# EAGLE board tinyI2C_P (EAGLE 6.5.0), part 1 of 2
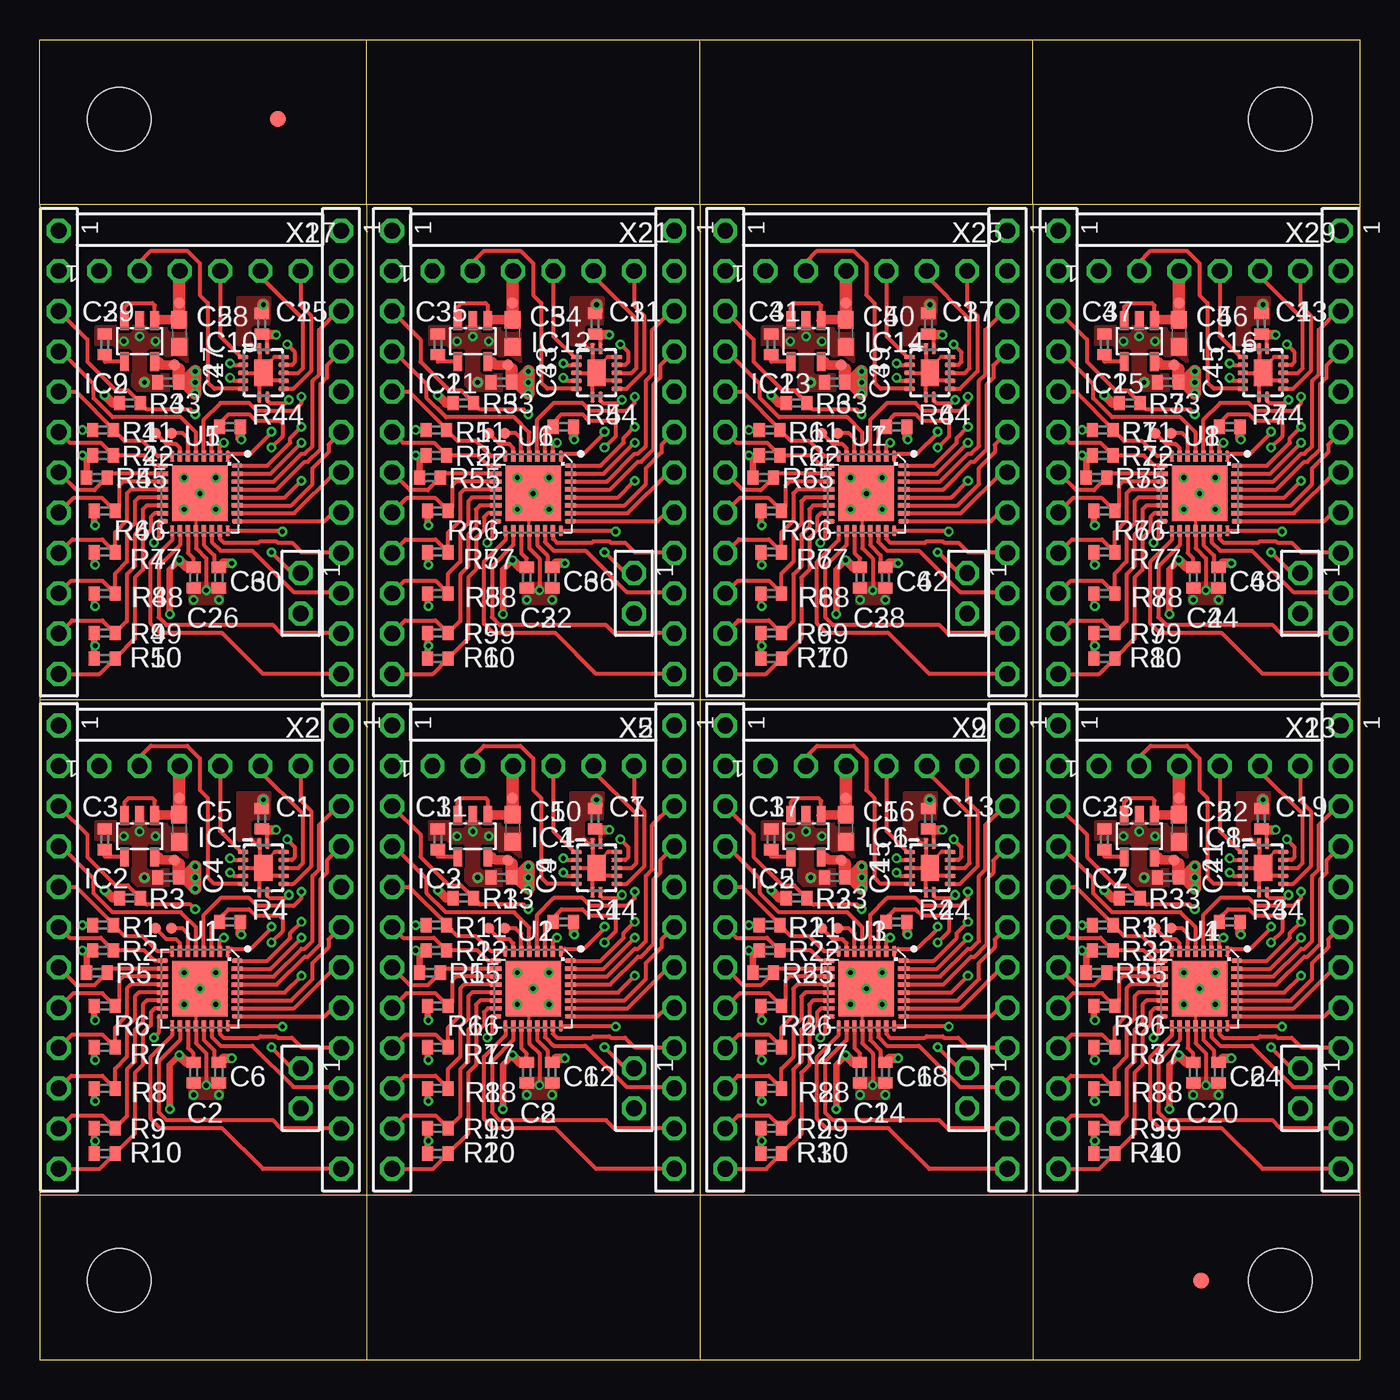
[diagram p0: board, top side]
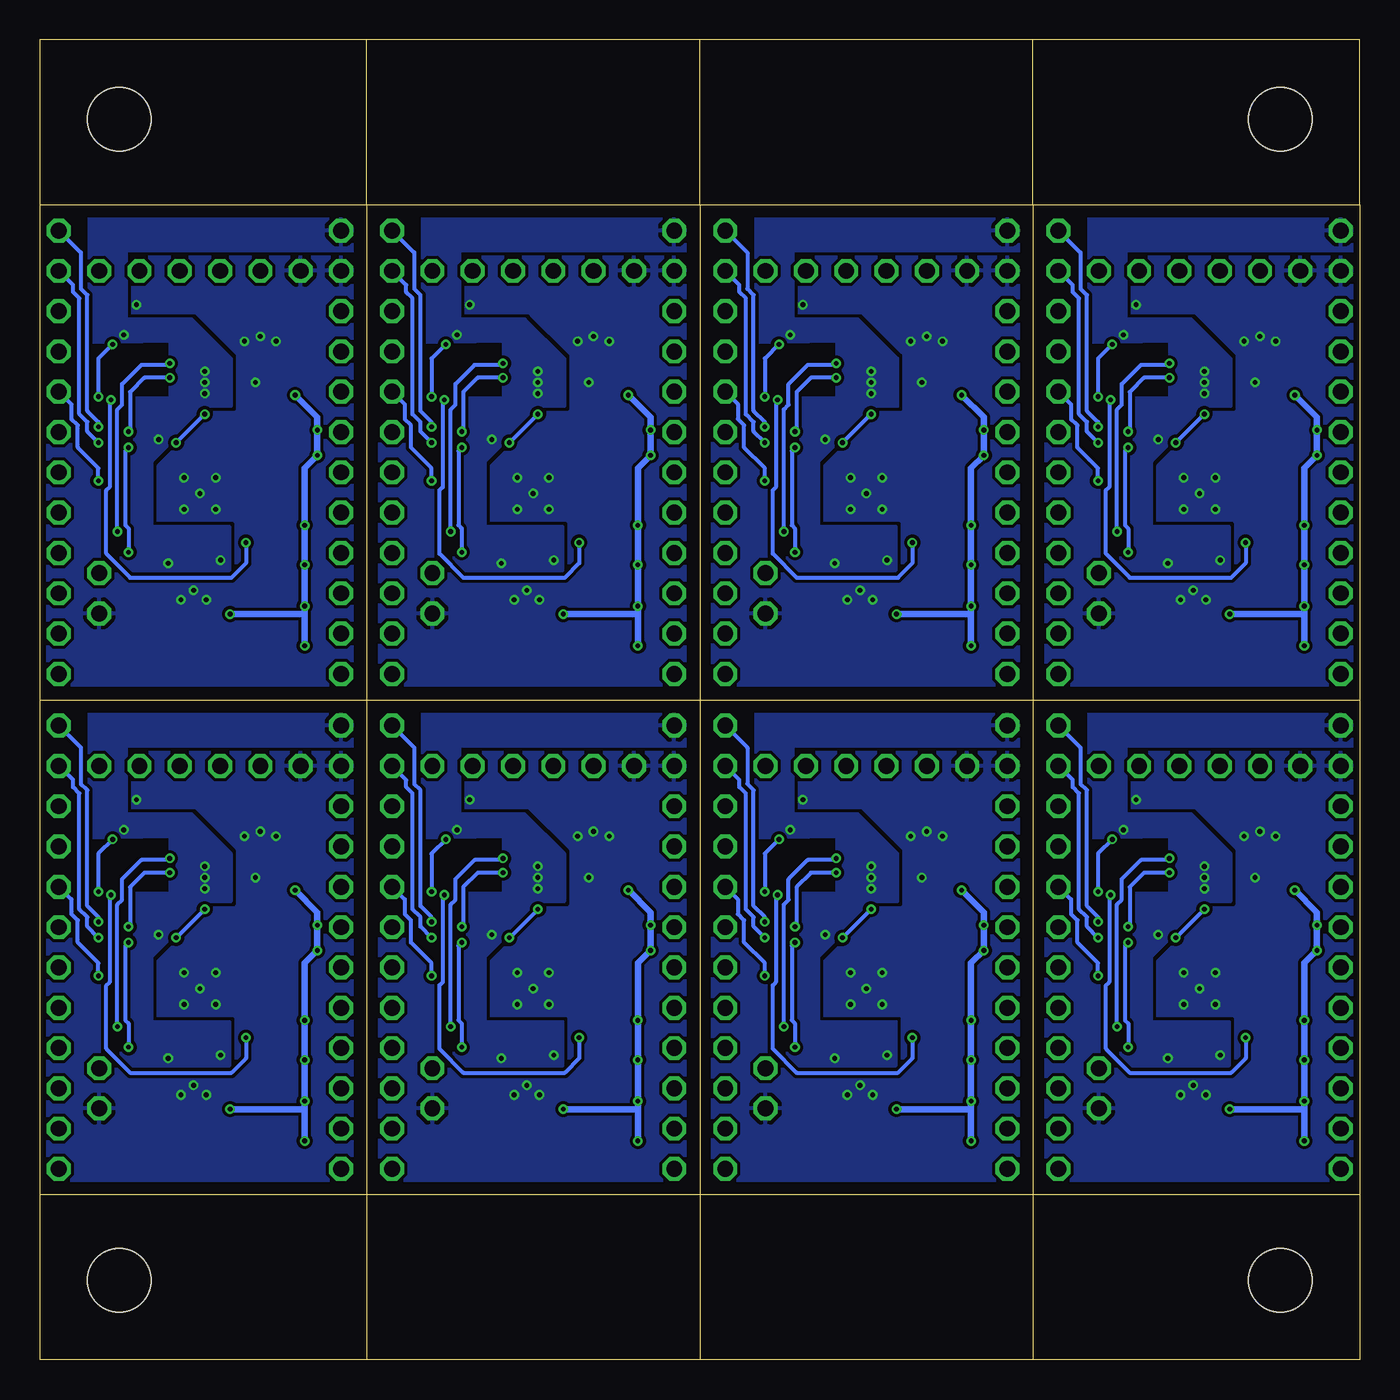
[diagram p1: board, bottom side, seen from below]

Size 83.2 x 83.2 mm. Coordinates in mm from the lower left corner, seen from the top.
Outline: 0,10.4 20.6,10.4
Outline: 20.6,10.4 41.6,10.4
Outline: 41.6,10.4 62.6,10.4
Outline: 62.6,10.4 83.2,10.4
Outline: 83.2,72.8 62.6,72.8
Outline: 62.6,72.8 41.6,72.8
Outline: 41.6,72.8 20.6,72.8
Outline: 20.6,72.8 0,72.8
Outline: 0,72.8 0,41.6
Outline: 0,41.6 0,10.4
Outline: 83.2,72.8 83.2,41.6
Outline: 83.2,41.6 83.2,10.4
Outline: 20.6,72.8 20.6,41.6
Outline: 20.6,41.6 20.6,10.4
Outline: 20.6,41.6 0,41.6
Outline: 41.6,72.8 41.6,41.6
Outline: 41.6,41.6 20.6,41.6
Outline: 41.6,41.6 41.6,10.4
Outline: 62.6,41.6 41.6,41.6
Outline: 62.6,72.8 62.6,41.6
Outline: 83.2,41.6 62.6,41.6
Outline: 62.6,41.6 62.6,10.4
Outline: 0,72.8 0,83.2 20.6,83.2
Outline: 20.6,83.2 41.6,83.2
Outline: 41.6,83.2 62.6,83.2
Outline: 62.6,83.2 83.2,83.2 83.2,72.8
Outline: 83.2,10.4 83.2,0 62.6,0
Outline: 20.6,0 0,0 0,10.4
Outline: 20.6,0 41.6,0
Outline: 41.6,0 62.6,0
Outline: 20.6,72.8 20.6,83.2
Outline: 41.6,72.8 41.6,83.2
Outline: 62.6,72.8 62.6,83.2
Outline: 62.6,10.4 62.6,0
Outline: 41.6,10.4 41.6,0
Outline: 20.6,10.4 20.6,0
Copper layers (1*16): Top 0.035mm / dielectric 1.5mm / Bottom 0.035mm
Design rules "default *": minimum track width 0.15mm, minimum drill 0.3mm, track to track 0.15mm, track to pad 0.15mm, pad to pad 0.15mm, via to via 0.15mm, smd to smd 0mil, copper to edge 0.4mm, drill to drill 8mil, minimum pad ring 0.15mm, minimum via ring 0.15mm, stop-mask expansion 4mil, vias tented up to drill 100mil, thermal gap 10mil
Net classes: 0 default: clearance 0.2 mm; 1 power: clearance 0.2 mm
Holes 4 mm at 5,78.2 78.2,5 78.2,78.2 5,5
bRestrict: 32 lines

## Footprints (pad centres in the part's own frame; a part is rotated, then mirrored left to right if it is on the bottom)
C1005 = smd 0.7 x 0.9: 1 -0.65,0; 2 0.65,0
C1608 = smd 1.1 x 1: 1 -0.85,0; 2 0.85,0
DHVQFN14 = smd 0.7 x 0.28: 1 -1.525,-0.25; 7 1.525,-0.25; 8 1.525,0.25; 14 -1.525,0.25 | smd 0.28 x 0.7: 2 -1,-1.275; 3 -0.5,-1.275; 4 0,-1.275; 5 0.5,-1.275; 6 1,-1.275; 9 1,1.275; 10 0.5,1.275; 11 0,1.275; 12 -0.5,1.275; 13 -1,1.275 | smd 1.65 x 1.15: EXP 0,0
SOT23-DBV = smd 0.55 x 1.2: 1 -0.95,-1.3; 2 0,-1.3; 3 0.95,-1.3; 4 0.95,1.3; 5 -0.95,1.3
R1005 = smd 0.7 x 0.9: 1 -0.65,0; 2 0.65,0
TP07R = smd 0.7 x 0.7: TP 0,0
TP10R = smd 1 x 1: TP 0,0
HVQFN33 = smd 0.7 x 0.28: 1 -2.35,1.75; 2 -2.35,1.25; 3 -2.35,0.75; 4 -2.35,0.25; 5 -2.35,-0.25; 6 -2.35,-0.75; 7 -2.35,-1.25; 8 -2.35,-1.75; 17 2.35,-1.75; 18 2.35,-1.25; 19 2.35,-0.75; 20 2.35,-0.25; 21 2.35,0.25; 22 2.35,0.75; 23 2.35,1.25; 24 2.35,1.75 | smd 0.28 x 0.7: 9 -1.75,-2.35; 10 -1.25,-2.35; 11 -0.75,-2.35; 12 -0.25,-2.35; 13 0.25,-2.35; 14 0.75,-2.35; 15 1.25,-2.35; 16 1.75,-2.35; 25 1.75,2.35; 26 1.25,2.35; 27 0.75,2.35; 28 0.25,2.35; 29 -0.25,2.35; 30 -0.75,2.35; 31 -1.25,2.35; 32 -1.75,2.35 | smd 3.5 x 3.5: EXP 0,0
TSW-112-02-S-S = drill 1 pad 1.5 octagon: 1 13.97,0; 2 11.43,0; 3 8.89,0; 4 6.35,0; 5 3.81,0; 6 1.27,0; 7 -1.27,0; 8 -3.81,0; 9 -6.35,0; 10 -8.89,0; 11 -11.43,0; 12 -13.97,0
TSW-106-02-S-S-RA = drill 1 pad 1.5 octagon: 1 6.35,1.524; 2 3.81,1.524; 3 1.27,1.524; 4 -1.27,1.524; 5 -3.81,1.524; 6 -6.35,1.524
TSW-102-02-S-S = drill 1 pad 1.5 octagon: 1 1.27,0; 2 -1.27,0

## Placement (x,y rotation side)
C1  1005  [C1005]  14,34.1 90 top
C2  1005  [C1005]  9.7,18.1 270 top
C3  1005  [C1005]  4.1,32.8 90 top
C4  1005  [C1005]  8.1,30.4 180 top
C5  1608  [C1608]  8.8,33.5 270 top
C6  1005  [C1005]  11.3,18.1 270 top
C7  1005  [C1005]  35,34.1 90 top
C8  1005  [C1005]  30.7,18.1 270 top
C9  1005  [C1005]  29.1,30.4 180 top
C10  1608  [C1608]  29.8,33.5 270 top
C11  1005  [C1005]  25.1,32.8 90 top
C12  1005  [C1005]  32.3,18.1 270 top
C13  1005  [C1005]  56,34.1 90 top
C14  1005  [C1005]  51.7,18.1 270 top
C15  1005  [C1005]  50.1,30.4 180 top
C16  1608  [C1608]  50.8,33.5 270 top
C17  1005  [C1005]  46.1,32.8 90 top
C18  1005  [C1005]  53.3,18.1 270 top
C19  1005  [C1005]  77,34.1 90 top
C20  1005  [C1005]  72.7,18.1 270 top
C21  1005  [C1005]  71.1,30.4 180 top
C22  1608  [C1608]  71.8,33.5 270 top
C23  1005  [C1005]  67.1,32.8 90 top
C24  1005  [C1005]  74.3,18.1 270 top
C25  1005  [C1005]  14,65.3 90 top
C26  1005  [C1005]  9.7,49.3 270 top
C27  1005  [C1005]  8.1,61.6 180 top
C28  1608  [C1608]  8.8,64.7 270 top
C29  1005  [C1005]  4.1,64 90 top
C30  1005  [C1005]  11.3,49.3 270 top
C31  1005  [C1005]  35,65.3 90 top
C32  1005  [C1005]  30.7,49.3 270 top
C33  1005  [C1005]  29.1,61.6 180 top
C34  1608  [C1608]  29.8,64.7 270 top
C35  1005  [C1005]  25.1,64 90 top
C36  1005  [C1005]  32.3,49.3 270 top
C37  1005  [C1005]  56,65.3 90 top
C38  1005  [C1005]  51.7,49.3 270 top
C39  1005  [C1005]  50.1,61.6 180 top
C40  1608  [C1608]  50.8,64.7 270 top
C41  1005  [C1005]  46.1,64 90 top
C42  1005  [C1005]  53.3,49.3 270 top
C43  1005  [C1005]  77,65.3 90 top
C44  1005  [C1005]  72.7,49.3 270 top
C45  1005  [C1005]  71.1,61.6 180 top
C46  1608  [C1608]  71.8,64.7 270 top
C47  1005  [C1005]  67.1,64 90 top
C48  1005  [C1005]  74.3,49.3 270 top
IC1  74ABT125BQ  [DHVQFN14]  14.1,31 270 top
IC2  TPS76318  [SOT23-DBV]  6.3,33 180 top
IC3  TPS76318  [SOT23-DBV]  27.3,33 180 top
IC4  74ABT125BQ  [DHVQFN14]  35.1,31 270 top
IC5  TPS76318  [SOT23-DBV]  48.3,33 180 top
IC6  74ABT125BQ  [DHVQFN14]  56.1,31 270 top
IC7  TPS76318  [SOT23-DBV]  69.3,33 180 top
IC8  74ABT125BQ  [DHVQFN14]  77.1,31 270 top
IC9  TPS76318  [SOT23-DBV]  6.3,64.2 180 top
IC10  74ABT125BQ  [DHVQFN14]  14.1,62.2 270 top
IC11  TPS76318  [SOT23-DBV]  27.3,64.2 180 top
IC12  74ABT125BQ  [DHVQFN14]  35.1,62.2 270 top
IC13  TPS76318  [SOT23-DBV]  48.3,64.2 180 top
IC14  74ABT125BQ  [DHVQFN14]  56.1,62.2 270 top
IC15  TPS76318  [SOT23-DBV]  69.3,64.2 180 top
IC16  74ABT125BQ  [DHVQFN14]  77.1,62.2 270 top
R1  220/1005  [R1005]  4,27.4 180 top
R2  220/1005  [R1005]  4,25.8 180 top
R3  10k/1005  [R1005]  5.7,29.1 180 top
R4  10k/1005  [R1005]  12,27.6 0 top
R5  10k/1005  [R1005]  3.6,24.4 180 top
R6  10k/1005  [R1005]  4.1,22.3 180 top
R7  10k/1005  [R1005]  4.1,19.7 180 top
R8  10k/1005  [R1005]  4.1,17.1 180 top
R9  10k/1005  [R1005]  4.1,14.6 180 top
R10  10k/1005  [R1005]  4.1,13 180 top
R11  220/1005  [R1005]  25,27.4 180 top
R12  220/1005  [R1005]  25,25.8 180 top
R13  10k/1005  [R1005]  26.7,29.1 180 top
R14  10k/1005  [R1005]  33,27.6 0 top
R15  10k/1005  [R1005]  24.6,24.4 180 top
R16  10k/1005  [R1005]  25.1,22.3 180 top
R17  10k/1005  [R1005]  25.1,19.7 180 top
R18  10k/1005  [R1005]  25.1,17.1 180 top
R19  10k/1005  [R1005]  25.1,14.6 180 top
R20  10k/1005  [R1005]  25.1,13 180 top
R21  220/1005  [R1005]  46,27.4 180 top
R22  220/1005  [R1005]  46,25.8 180 top
R23  10k/1005  [R1005]  47.7,29.1 180 top
R24  10k/1005  [R1005]  54,27.6 0 top
R25  10k/1005  [R1005]  45.6,24.4 180 top
R26  10k/1005  [R1005]  46.1,22.3 180 top
R27  10k/1005  [R1005]  46.1,19.7 180 top
R28  10k/1005  [R1005]  46.1,17.1 180 top
R29  10k/1005  [R1005]  46.1,14.6 180 top
R30  10k/1005  [R1005]  46.1,13 180 top
R31  220/1005  [R1005]  67,27.4 180 top
R32  220/1005  [R1005]  67,25.8 180 top
R33  10k/1005  [R1005]  68.7,29.1 180 top
R34  10k/1005  [R1005]  75,27.6 0 top
R35  10k/1005  [R1005]  66.6,24.4 180 top
R36  10k/1005  [R1005]  67.1,22.3 180 top
R37  10k/1005  [R1005]  67.1,19.7 180 top
R38  10k/1005  [R1005]  67.1,17.1 180 top
R39  10k/1005  [R1005]  67.1,14.6 180 top
R40  10k/1005  [R1005]  67.1,13 180 top
R41  220/1005  [R1005]  4,58.6 180 top
R42  220/1005  [R1005]  4,57 180 top
R43  10k/1005  [R1005]  5.7,60.3 180 top
R44  10k/1005  [R1005]  12,58.8 0 top
R45  10k/1005  [R1005]  3.6,55.6 180 top
R46  10k/1005  [R1005]  4.1,53.5 180 top
R47  10k/1005  [R1005]  4.1,50.9 180 top
R48  10k/1005  [R1005]  4.1,48.3 180 top
R49  10k/1005  [R1005]  4.1,45.8 180 top
R50  10k/1005  [R1005]  4.1,44.2 180 top
R51  220/1005  [R1005]  25,58.6 180 top
R52  220/1005  [R1005]  25,57 180 top
R53  10k/1005  [R1005]  26.7,60.3 180 top
R54  10k/1005  [R1005]  33,58.8 0 top
R55  10k/1005  [R1005]  24.6,55.6 180 top
R56  10k/1005  [R1005]  25.1,53.5 180 top
R57  10k/1005  [R1005]  25.1,50.9 180 top
R58  10k/1005  [R1005]  25.1,48.3 180 top
R59  10k/1005  [R1005]  25.1,45.8 180 top
R60  10k/1005  [R1005]  25.1,44.2 180 top
R61  220/1005  [R1005]  46,58.6 180 top
R62  220/1005  [R1005]  46,57 180 top
R63  10k/1005  [R1005]  47.7,60.3 180 top
R64  10k/1005  [R1005]  54,58.8 0 top
R65  10k/1005  [R1005]  45.6,55.6 180 top
R66  10k/1005  [R1005]  46.1,53.5 180 top
R67  10k/1005  [R1005]  46.1,50.9 180 top
R68  10k/1005  [R1005]  46.1,48.3 180 top
R69  10k/1005  [R1005]  46.1,45.8 180 top
R70  10k/1005  [R1005]  46.1,44.2 180 top
R71  220/1005  [R1005]  67,58.6 180 top
R72  220/1005  [R1005]  67,57 180 top
R73  10k/1005  [R1005]  68.7,60.3 180 top
R74  10k/1005  [R1005]  75,58.8 0 top
R75  10k/1005  [R1005]  66.6,55.6 180 top
R76  10k/1005  [R1005]  67.1,53.5 180 top
R77  10k/1005  [R1005]  67.1,50.9 180 top
R78  10k/1005  [R1005]  67.1,48.3 180 top
R79  10k/1005  [R1005]  67.1,45.8 180 top
R80  10k/1005  [R1005]  67.1,44.2 180 top
TP1  TPTP07R  [TP07R]  8.8,35.4 0 top
TP2  TPTP07R  [TP07R]  8.5,31.5 0 top
TP3  TPTP07R  [TP07R]  6.6,30.4 0 top
TP4  TPTP10R  [TP10R]  15,78.2 0 top
TP5  TPTP10R  [TP10R]  73.2,5 0 top
TP6  TPTP07R  [TP07R]  29.8,35.4 0 top
TP7  TPTP07R  [TP07R]  29.5,31.5 0 top
TP8  TPTP07R  [TP07R]  8.3,27.2 0 top
TP9  TPTP07R  [TP07R]  7.3,27.2 0 top
TP10  TPTP07R  [TP07R]  29.3,27.2 0 top
TP11  TPTP07R  [TP07R]  28.3,27.2 0 top
TP12  TPTP07R  [TP07R]  27.6,30.4 0 top
TP13  TPTP07R  [TP07R]  50.8,35.4 0 top
TP14  TPTP07R  [TP07R]  50.5,31.5 0 top
TP15  TPTP07R  [TP07R]  50.3,27.2 0 top
TP16  TPTP07R  [TP07R]  49.3,27.2 0 top
TP17  TPTP07R  [TP07R]  48.6,30.4 0 top
TP18  TPTP07R  [TP07R]  71.8,35.4 0 top
TP19  TPTP07R  [TP07R]  71.5,31.5 0 top
TP20  TPTP07R  [TP07R]  71.3,27.2 0 top
TP21  TPTP07R  [TP07R]  70.3,27.2 0 top
TP22  TPTP07R  [TP07R]  69.6,30.4 0 top
TP23  TPTP07R  [TP07R]  8.8,66.6 0 top
TP24  TPTP07R  [TP07R]  8.5,62.7 0 top
TP25  TPTP07R  [TP07R]  8.3,58.4 0 top
TP26  TPTP07R  [TP07R]  7.3,58.4 0 top
TP27  TPTP07R  [TP07R]  6.6,61.6 0 top
TP28  TPTP07R  [TP07R]  29.8,66.6 0 top
TP29  TPTP07R  [TP07R]  29.5,62.7 0 top
TP30  TPTP07R  [TP07R]  29.3,58.4 0 top
TP31  TPTP07R  [TP07R]  28.3,58.4 0 top
TP32  TPTP07R  [TP07R]  27.6,61.6 0 top
TP33  TPTP07R  [TP07R]  50.8,66.6 0 top
TP34  TPTP07R  [TP07R]  50.5,62.7 0 top
TP35  TPTP07R  [TP07R]  50.3,58.4 0 top
TP36  TPTP07R  [TP07R]  49.3,58.4 0 top
TP37  TPTP07R  [TP07R]  48.6,61.6 0 top
TP38  TPTP07R  [TP07R]  71.8,66.6 0 top
TP39  TPTP07R  [TP07R]  71.5,62.7 0 top
TP40  TPTP07R  [TP07R]  71.3,58.4 0 top
TP41  TPTP07R  [TP07R]  70.3,58.4 0 top
TP42  TPTP07R  [TP07R]  69.6,61.6 0 top
U1  LPC824M201JHI33  [HVQFN33]  10.1,23.4 270 top
U2  LPC824M201JHI33  [HVQFN33]  31.1,23.4 270 top
U3  LPC824M201JHI33  [HVQFN33]  52.1,23.4 270 top
U4  LPC824M201JHI33  [HVQFN33]  73.1,23.4 270 top
U5  LPC824M201JHI33  [HVQFN33]  10.1,54.6 270 top
U6  LPC824M201JHI33  [HVQFN33]  31.1,54.6 270 top
U7  LPC824M201JHI33  [HVQFN33]  52.1,54.6 270 top
U8  LPC824M201JHI33  [HVQFN33]  73.1,54.6 270 top
X1  TSW-112-02-S-S  [TSW-112-02-S-S]  1.21,26 90 top
X2  TSW-106-02-S-S-RA  [TSW-106-02-S-S-RA]  10.1,38.95 180 top
X3  TSW-112-02-S-S  [TSW-112-02-S-S]  18.99,26 90 top
X4  TSW-102-02-S-S  [TSW-102-02-S-S]  16.45,17.11 90 top
X5  TSW-106-02-S-S-RA  [TSW-106-02-S-S-RA]  31.1,38.95 180 top
X6  TSW-112-02-S-S  [TSW-112-02-S-S]  22.21,26 90 top
X7  TSW-112-02-S-S  [TSW-112-02-S-S]  39.99,26 90 top
X8  TSW-102-02-S-S  [TSW-102-02-S-S]  37.45,17.11 90 top
X9  TSW-106-02-S-S-RA  [TSW-106-02-S-S-RA]  52.1,38.95 180 top
X10  TSW-112-02-S-S  [TSW-112-02-S-S]  43.21,26 90 top
X11  TSW-112-02-S-S  [TSW-112-02-S-S]  60.99,26 90 top
X12  TSW-102-02-S-S  [TSW-102-02-S-S]  58.45,17.11 90 top
X13  TSW-106-02-S-S-RA  [TSW-106-02-S-S-RA]  73.1,38.95 180 top
X14  TSW-112-02-S-S  [TSW-112-02-S-S]  64.21,26 90 top
X15  TSW-112-02-S-S  [TSW-112-02-S-S]  81.99,26 90 top
X16  TSW-102-02-S-S  [TSW-102-02-S-S]  79.45,17.11 90 top
X17  TSW-106-02-S-S-RA  [TSW-106-02-S-S-RA]  10.1,70.15 180 top
X18  TSW-112-02-S-S  [TSW-112-02-S-S]  1.21,57.2 90 top
X19  TSW-112-02-S-S  [TSW-112-02-S-S]  18.99,57.2 90 top
X20  TSW-102-02-S-S  [TSW-102-02-S-S]  16.45,48.31 90 top
X21  TSW-106-02-S-S-RA  [TSW-106-02-S-S-RA]  31.1,70.15 180 top
X22  TSW-112-02-S-S  [TSW-112-02-S-S]  22.21,57.2 90 top
X23  TSW-112-02-S-S  [TSW-112-02-S-S]  39.99,57.2 90 top
X24  TSW-102-02-S-S  [TSW-102-02-S-S]  37.45,48.31 90 top
X25  TSW-106-02-S-S-RA  [TSW-106-02-S-S-RA]  52.1,70.15 180 top
X26  TSW-112-02-S-S  [TSW-112-02-S-S]  43.21,57.2 90 top
X27  TSW-112-02-S-S  [TSW-112-02-S-S]  60.99,57.2 90 top
X28  TSW-102-02-S-S  [TSW-102-02-S-S]  58.45,48.31 90 top
X29  TSW-106-02-S-S-RA  [TSW-106-02-S-S-RA]  73.1,70.15 180 top
X30  TSW-112-02-S-S  [TSW-112-02-S-S]  64.21,57.2 90 top
X31  TSW-112-02-S-S  [TSW-112-02-S-S]  81.99,57.2 90 top
X32  TSW-102-02-S-S  [TSW-102-02-S-S]  79.45,48.31 90 top

## Library data of the parts
C1-C48 R1-R80 = rcl
IC1 IC4 IC6 IC8 IC10 IC12 IC14 IC16 = 74xx-eu_local
IC2 IC3 IC5 IC7 IC9 IC11 IC13 IC15 = texas; MF: TEXAS INSTRUMENT CONNECTORS; MPN: TPS77018DBVR; OC_FARNELL: 1575745; OC_NEWARK: 77C1176
TP1-TP42 = testpad
U1-U8 = mbed-HDK
X1-X32 = con-samtec.local; OC_FARNELL: unknown; OC_NEWARK: unknown

## Nets
1.8V: C1.1 C2.1 C4.1 C6.1 IC1.14 IC2.5 R1.2 R2.2 R3.2 R4.2 R5.2 R6.2 R7.2 R8.2 R9.2 R10.2 TP2.TP U1.19 U1.21 X1.1
1.8V1: C7.1 C8.1 C9.1 C12.1 IC3.5 IC4.14 R11.2 R12.2 R13.2 R14.2 R15.2 R16.2 R17.2 R18.2 R19.2 R20.2 TP7.TP U2.19 U2.21 X6.1
1.8V2: C13.1 C14.1 C15.1 C18.1 IC5.5 IC6.14 R21.2 R22.2 R23.2 R24.2 R25.2 R26.2 R27.2 R28.2 R29.2 R30.2 TP14.TP U3.19 U3.21 X10.1
1.8V3: C19.1 C20.1 C21.1 C24.1 IC7.5 IC8.14 R31.2 R32.2 R33.2 R34.2 R35.2 R36.2 R37.2 R38.2 R39.2 R40.2 TP19.TP U4.19 U4.21 X14.1
1.8V4: C25.1 C26.1 C27.1 C30.1 IC9.5 IC10.14 R41.2 R42.2 R43.2 R44.2 R45.2 R46.2 R47.2 R48.2 R49.2 R50.2 TP24.TP U5.19 U5.21 X18.1
1.8V5: C31.1 C32.1 C33.1 C36.1 IC11.5 IC12.14 R51.2 R52.2 R53.2 R54.2 R55.2 R56.2 R57.2 R58.2 R59.2 R60.2 TP29.TP U6.19 U6.21 X22.1
1.8V6: C37.1 C38.1 C39.1 C42.1 IC13.5 IC14.14 R61.2 R62.2 R63.2 R64.2 R65.2 R66.2 R67.2 R68.2 R69.2 R70.2 TP34.TP U7.19 U7.21 X26.1
1.8V7: C43.1 C44.1 C45.1 C48.1 IC15.5 IC16.14 R71.2 R72.2 R73.2 R74.2 R75.2 R76.2 R77.2 R78.2 R79.2 R80.2 TP39.TP U8.19 U8.21 X30.1
5V: C5.1 IC2.1 IC2.3 TP1.TP X2.3
5V1: C10.1 IC3.1 IC3.3 TP6.TP X5.3
5V2: C16.1 IC5.1 IC5.3 TP13.TP X9.3
5V3: C22.1 IC7.1 IC7.3 TP18.TP X13.3
5V4: C28.1 IC9.1 IC9.3 TP23.TP X17.3
5V5: C34.1 IC11.1 IC11.3 TP28.TP X21.3
5V6: C40.1 IC13.1 IC13.3 TP33.TP X25.3
5V7: C46.1 IC15.1 IC15.3 TP38.TP X29.3
!ISP!: R3.1 U1.2 X1.3
!ISP!1: R13.1 U2.2 X6.3
!ISP!2: R23.1 U3.2 X10.3
!ISP!3: R33.1 U4.2 X14.3
!ISP!4: R43.1 U5.2 X18.3
!ISP!5: R53.1 U6.2 X22.3
!ISP!6: R63.1 U7.2 X26.3
!ISP!7: R73.1 U8.2 X30.3
!RESET!: R4.1 U1.3 X4.1
!RESET!1: R14.1 U2.3 X8.1
!RESET!2: R24.1 U3.3 X12.1
!RESET!3: R34.1 U4.3 X16.1
!RESET!4: R44.1 U5.3 X20.1
!RESET!5: R54.1 U6.3 X24.1
!RESET!6: R64.1 U7.3 X28.1
!RESET!7: R74.1 U8.3 X32.1
CTS<-: IC1.6 X2.2
CTS<-1: IC4.6 X5.2
CTS<-2: IC6.6 X9.2
CTS<-3: IC8.6 X13.2
CTS<-4: IC10.6 X17.2
CTS<-5: IC12.6 X21.2
CTS<-6: IC14.6 X25.2
CTS<-7: IC16.6 X29.2
GND: C1.2 C2.2 C3.2 C4.2 C5.2 C6.2 IC1.1 IC1.4 IC1.7 IC1.10 IC1.13 IC1.EXP IC2.2 TP3.TP U1.20 U1.EXP X1.2 X2.1 X4.2
GND1: C7.2 C8.2 C9.2 C10.2 C11.2 C12.2 IC3.2 IC4.1 IC4.4 IC4.7 IC4.10 IC4.13 IC4.EXP TP12.TP U2.20 U2.EXP X5.1 X6.2 X8.2
GND2: C13.2 C14.2 C15.2 C16.2 C17.2 C18.2 IC5.2 IC6.1 IC6.4 IC6.7 IC6.10 IC6.13 IC6.EXP TP17.TP U3.20 U3.EXP X9.1 X10.2 X12.2
GND3: C19.2 C20.2 C21.2 C22.2 C23.2 C24.2 IC7.2 IC8.1 IC8.4 IC8.7 IC8.10 IC8.13 IC8.EXP TP22.TP U4.20 U4.EXP X13.1 X14.2 X16.2
GND4: C25.2 C26.2 C27.2 C28.2 C29.2 C30.2 IC9.2 IC10.1 IC10.4 IC10.7 IC10.10 IC10.13 IC10.EXP TP27.TP U5.20 U5.EXP X17.1 X18.2 X20.2
GND5: C31.2 C32.2 C33.2 C34.2 C35.2 C36.2 IC11.2 IC12.1 IC12.4 IC12.7 IC12.10 IC12.13 IC12.EXP TP32.TP U6.20 U6.EXP X21.1 X22.2 X24.2
GND6: C37.2 C38.2 C39.2 C40.2 C41.2 C42.2 IC13.2 IC14.1 IC14.4 IC14.7 IC14.10 IC14.13 IC14.EXP TP37.TP U7.20 U7.EXP X25.1 X26.2 X28.2
GND7: C43.2 C44.2 C45.2 C46.2 C47.2 C48.2 IC15.2 IC16.1 IC16.4 IC16.7 IC16.10 IC16.13 IC16.EXP TP42.TP U8.20 U8.EXP X29.1 X30.2 X32.2
GPIO00: U1.32 X3.1
GPIO01: U1.31 X3.2
GPIO02: U1.30 X3.3
GPIO03: U1.29 X3.4
GPIO04: U1.28 X3.5
GPIO05: U1.27 X3.6
GPIO06: U1.26 X3.7
GPIO07: U1.25 X3.8
GPIO08: U2.5 X6.4
GPIO09: R15.1 U2.10 X6.7
GPIO10: R10.1 U1.15 X1.12
GPIO11: R9.1 U1.14 X1.11
GPIO12: R8.1 U1.13 X1.10
GPIO13: R7.1 U1.12 X1.9
GPIO14: R6.1 U1.11 X1.8
GPIO15: R5.1 U1.10 X1.7
GPIO16: U1.5 X1.4
GPIO17: R16.1 U2.11 X6.8
GPIO18: R17.1 U2.12 X6.9
GPIO19: R18.1 U2.13 X6.10
GPIO20: R19.1 U2.14 X6.11
GPIO21: R20.1 U2.15 X6.12
GPIO22: U2.25 X7.8
GPIO23: U2.26 X7.7
GPIO24: U2.27 X7.6
GPIO25: U2.28 X7.5
GPIO26: U2.29 X7.4
GPIO27: U2.30 X7.3
GPIO28: U2.31 X7.2
GPIO29: U2.32 X7.1
GPIO30: U3.5 X10.4
GPIO31: R25.1 U3.10 X10.7
GPIO32: R26.1 U3.11 X10.8
GPIO33: R27.1 U3.12 X10.9
GPIO34: R28.1 U3.13 X10.10
GPIO35: R29.1 U3.14 X10.11
GPIO36: R30.1 U3.15 X10.12
GPIO37: U3.25 X11.8
GPIO38: U3.26 X11.7
GPIO39: U3.27 X11.6
GPIO40: U3.28 X11.5
GPIO41: U3.29 X11.4
GPIO42: U3.30 X11.3
GPIO43: U3.31 X11.2
GPIO44: U3.32 X11.1
GPIO45: U4.5 X14.4
GPIO46: R35.1 U4.10 X14.7
GPIO47: R36.1 U4.11 X14.8
GPIO48: R37.1 U4.12 X14.9
GPIO49: R38.1 U4.13 X14.10
GPIO50: R39.1 U4.14 X14.11
GPIO51: R40.1 U4.15 X14.12
GPIO52: U4.25 X15.8
GPIO53: U4.26 X15.7
GPIO54: U4.27 X15.6
GPIO55: U4.28 X15.5
GPIO56: U4.29 X15.4
GPIO57: U4.30 X15.3
GPIO58: U4.31 X15.2
GPIO59: U4.32 X15.1
GPIO60: U5.5 X18.4
GPIO61: R45.1 U5.10 X18.7
GPIO62: R46.1 U5.11 X18.8
GPIO63: R47.1 U5.12 X18.9
GPIO64: R48.1 U5.13 X18.10
GPIO65: R49.1 U5.14 X18.11
GPIO66: R50.1 U5.15 X18.12
GPIO67: U5.25 X19.8
GPIO68: U5.26 X19.7
GPIO69: U5.27 X19.6
GPIO70: U5.28 X19.5
GPIO71: U5.29 X19.4
GPIO72: U5.30 X19.3
GPIO73: U5.31 X19.2
GPIO74: U5.32 X19.1
GPIO75: U6.5 X22.4
GPIO76: R55.1 U6.10 X22.7
GPIO77: R56.1 U6.11 X22.8
GPIO78: R57.1 U6.12 X22.9
GPIO79: R58.1 U6.13 X22.10
GPIO80: R59.1 U6.14 X22.11
GPIO81: R60.1 U6.15 X22.12
GPIO82: U6.25 X23.8
GPIO83: U6.26 X23.7
GPIO84: U6.27 X23.6
GPIO85: U6.28 X23.5
GPIO86: U6.29 X23.4
GPIO87: U6.30 X23.3
GPIO88: U6.31 X23.2
GPIO89: U6.32 X23.1
GPIO90: U7.5 X26.4
GPIO91: R65.1 U7.10 X26.7
GPIO92: R66.1 U7.11 X26.8
GPIO93: R67.1 U7.12 X26.9
GPIO94: R68.1 U7.13 X26.10
GPIO95: R69.1 U7.14 X26.11
GPIO96: R70.1 U7.15 X26.12
GPIO97: U7.25 X27.8
GPIO98: U7.26 X27.7
GPIO99: U7.27 X27.6
GPIO100: U7.28 X27.5
GPIO101: U7.29 X27.4
GPIO102: U7.30 X27.3
GPIO103: U7.31 X27.2
GPIO104: U7.32 X27.1
GPIO105: U8.5 X30.4
GPIO106: R75.1 U8.10 X30.7
GPIO107: R76.1 U8.11 X30.8
GPIO108: R77.1 U8.12 X30.9
GPIO109: R78.1 U8.13 X30.10
GPIO110: R79.1 U8.14 X30.11
GPIO111: R80.1 U8.15 X30.12
GPIO112: U8.25 X31.8
GPIO113: U8.26 X31.7
GPIO114: U8.27 X31.6
GPIO115: U8.28 X31.5
GPIO116: U8.29 X31.4
GPIO117: U8.30 X31.3
GPIO118: U8.31 X31.2
GPIO119: U8.32 X31.1
I2C_SCL: R2.1 U1.9 X1.6
I2C_SCL1: R12.1 U2.9 X6.6
I2C_SCL2: R22.1 U3.9 X10.6
I2C_SCL3: R32.1 U4.9 X14.6
I2C_SCL4: R42.1 U5.9 X18.6
I2C_SCL5: R52.1 U6.9 X22.6
I2C_SCL6: R62.1 U7.9 X26.6
I2C_SCL7: R72.1 U8.9 X30.6
I2C_SDA: R1.1 U1.8 X1.5
I2C_SDA1: R11.1 U2.8 X6.5
I2C_SDA2: R21.1 U3.8 X10.5
I2C_SDA3: R31.1 U4.8 X14.5
I2C_SDA4: R41.1 U5.8 X18.5
I2C_SDA5: R51.1 U6.8 X22.5
I2C_SDA6: R61.1 U7.8 X26.5
I2C_SDA7: R71.1 U8.8 X30.5
N$1: C3.1 IC2.4
N$2: C11.1 IC3.4
N$3: C17.1 IC5.4
N$4: C23.1 IC7.4
N$5: C29.1 IC9.4
N$6: C35.1 IC11.4
N$7: C41.1 IC13.4
N$8: C47.1 IC15.4
RTS->: IC1.9 X2.6
RTS->1: IC4.9 X5.6
RTS->2: IC6.9 X9.6
RTS->3: IC8.9 X13.6
RTS->4: IC10.9 X17.6
RTS->5: IC12.9 X21.6
RTS->6: IC14.9 X25.6
RTS->7: IC16.9 X29.6
RX<-: IC1.11 X2.5
RX<-1: IC4.11 X5.5
RX<-2: IC6.11 X9.5
RX<-3: IC8.11 X13.5
RX<-4: IC10.11 X17.5
RX<-5: IC12.11 X21.5
RX<-6: IC14.11 X25.5
RX<-7: IC16.11 X29.5
SPI_CS: U1.17 X3.12
SPI_CS1: U2.17 X7.12
SPI_CS2: U3.17 X11.12
SPI_CS3: U4.17 X15.12
SPI_CS4: U5.17 X19.12
SPI_CS5: U6.17 X23.12
SPI_CS6: U7.17 X27.12
SPI_CS7: U8.17 X31.12
SPI_MISO: U1.22 X3.10
SPI_MISO1: U2.22 X7.10
SPI_MISO2: U3.22 X11.10
SPI_MISO3: U4.22 X15.10
SPI_MISO4: U5.22 X19.10
SPI_MISO5: U6.22 X23.10
SPI_MISO6: U7.22 X27.10
SPI_MISO7: U8.22 X31.10
SPI_MOSI: U1.23 X3.9
SPI_MOSI1: U2.23 X7.9
SPI_MOSI2: U3.23 X11.9
SPI_MOSI3: U4.23 X15.9
SPI_MOSI4: U5.23 X19.9
SPI_MOSI5: U6.23 X23.9
SPI_MOSI6: U7.23 X27.9
SPI_MOSI7: U8.23 X31.9
SPI_SCK: U1.18 X3.11
SPI_SCK1: U2.18 X7.11
SPI_SCK2: U3.18 X11.11
SPI_SCK3: U4.18 X15.11
SPI_SCK4: U5.18 X19.11
SPI_SCK5: U6.18 X23.11
SPI_SCK6: U7.18 X27.11
SPI_SCK7: U8.18 X31.11
SWCLK: TP8.TP U1.6
SWCLK1: TP10.TP U2.6
SWCLK2: TP15.TP U3.6
SWCLK3: TP20.TP U4.6
SWCLK4: TP25.TP U5.6
SWCLK5: TP30.TP U6.6
SWCLK6: TP35.TP U7.6
SWCLK7: TP40.TP U8.6
SWDIO: TP9.TP U1.7
SWDIO1: TP11.TP U2.7
SWDIO2: TP16.TP U3.7
SWDIO3: TP21.TP U4.7
SWDIO4: TP26.TP U5.7
SWDIO5: TP31.TP U6.7
SWDIO6: TP36.TP U7.7
SWDIO7: TP41.TP U8.7
TGT_CTS: IC1.8 U1.16
TGT_CTS1: IC4.8 U2.16
TGT_CTS2: IC6.8 U3.16
TGT_CTS3: IC8.8 U4.16
TGT_CTS4: IC10.8 U5.16
TGT_CTS5: IC12.8 U6.16
TGT_CTS6: IC14.8 U7.16
TGT_CTS7: IC16.8 U8.16
TGT_RTS: IC1.5 U1.1
TGT_RTS1: IC4.5 U2.1
TGT_RTS2: IC6.5 U3.1
TGT_RTS3: IC8.5 U4.1
TGT_RTS4: IC10.5 U5.1
TGT_RTS5: IC12.5 U6.1
TGT_RTS6: IC14.5 U7.1
TGT_RTS7: IC16.5 U8.1
TGT_RX: IC1.3 U1.24
TGT_RX1: IC4.3 U2.24
TGT_RX2: IC6.3 U3.24
TGT_RX3: IC8.3 U4.24
TGT_RX4: IC10.3 U5.24
TGT_RX5: IC12.3 U6.24
TGT_RX6: IC14.3 U7.24
TGT_RX7: IC16.3 U8.24
TGT_TX: IC1.12 U1.4
TGT_TX1: IC4.12 U2.4
TGT_TX2: IC6.12 U3.4
TGT_TX3: IC8.12 U4.4
TGT_TX4: IC10.12 U5.4
TGT_TX5: IC12.12 U6.4
TGT_TX6: IC14.12 U7.4
TGT_TX7: IC16.12 U8.4
TX->: IC1.2 X2.4
TX->1: IC4.2 X5.4
TX->2: IC6.2 X9.4
TX->3: IC8.2 X13.4
TX->4: IC10.2 X17.4
TX->5: IC12.2 X21.4
TX->6: IC14.2 X25.4
TX->7: IC16.2 X29.4